# Altium PCB PCB1.PcbDoc
Units mm, origin at the board's own origin, x right, y up, seen from the top; angles counter-clockwise.
Board outline 95.5 x 100 mm, 4 copper layers (Top Layer, GND, POWER, Bottom Layer), stack 0.603 mm thick; 49 components, 46 nets, 157 pads, 25 vias.
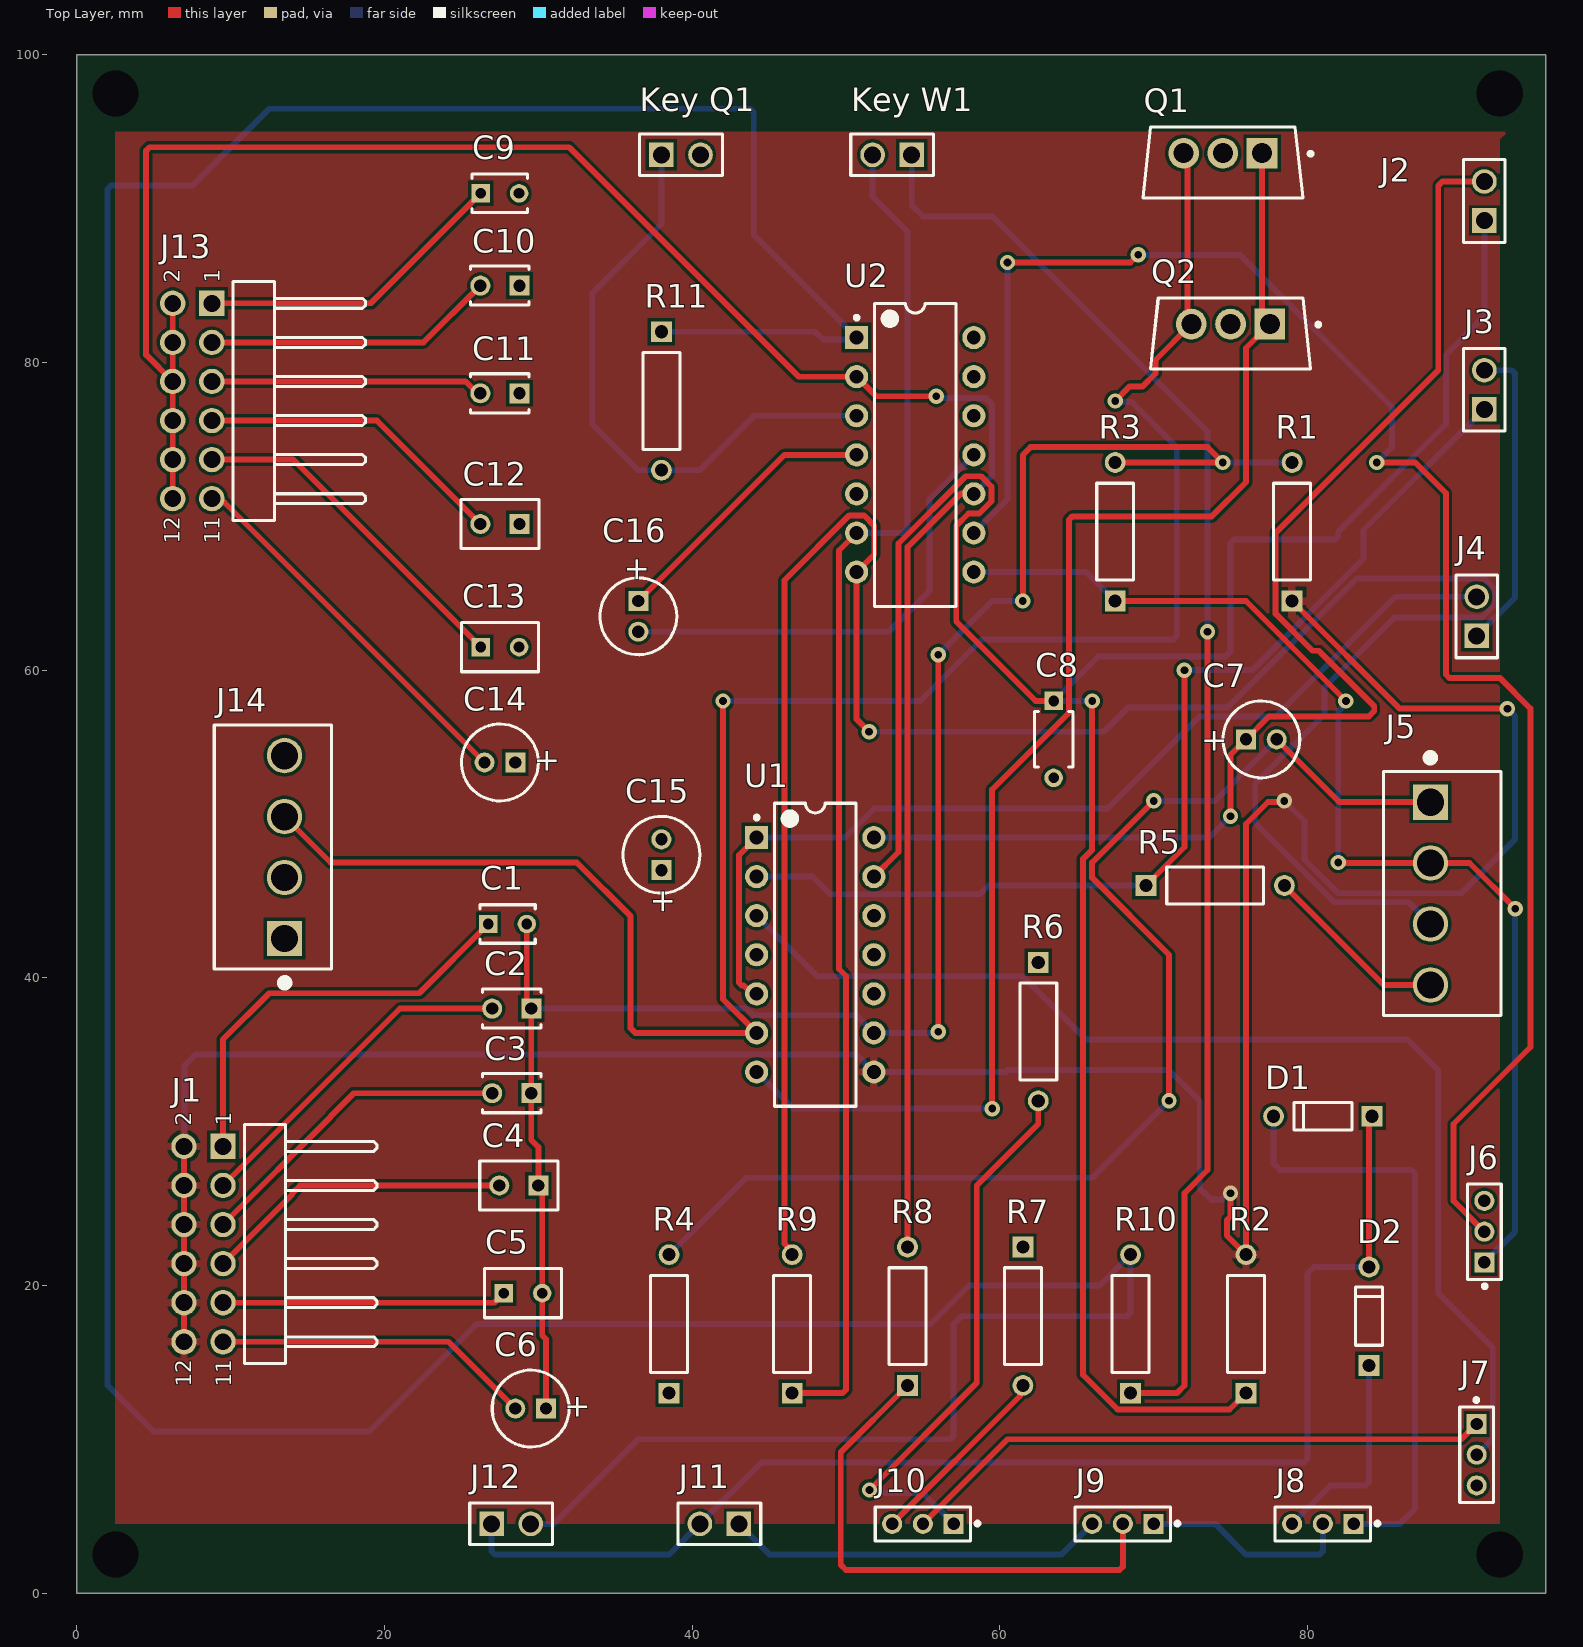
[diagram p0: Top Layer view]
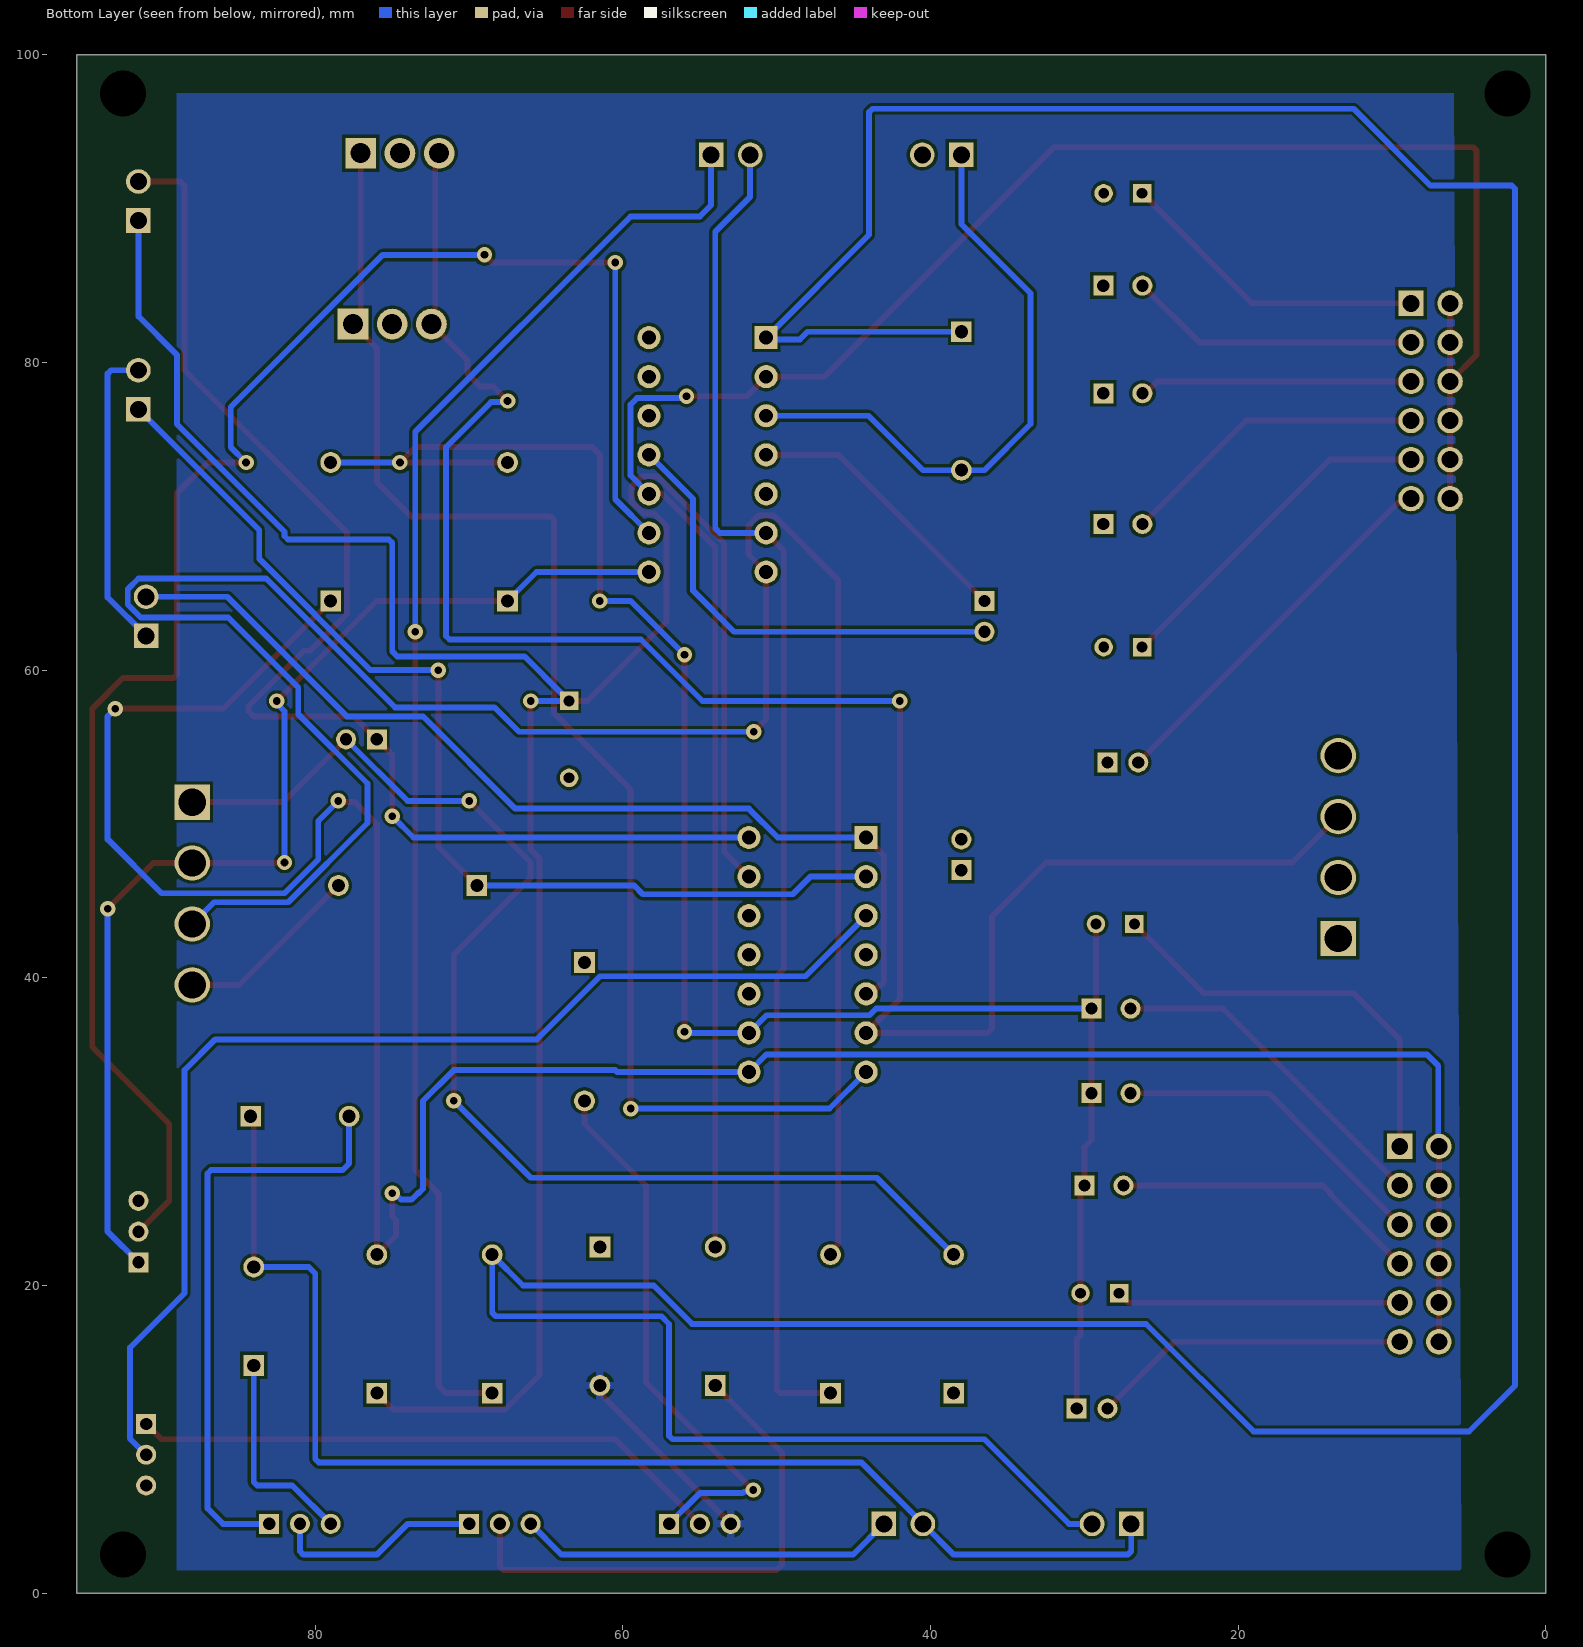
[diagram p1: Bottom Layer view, seen from below]
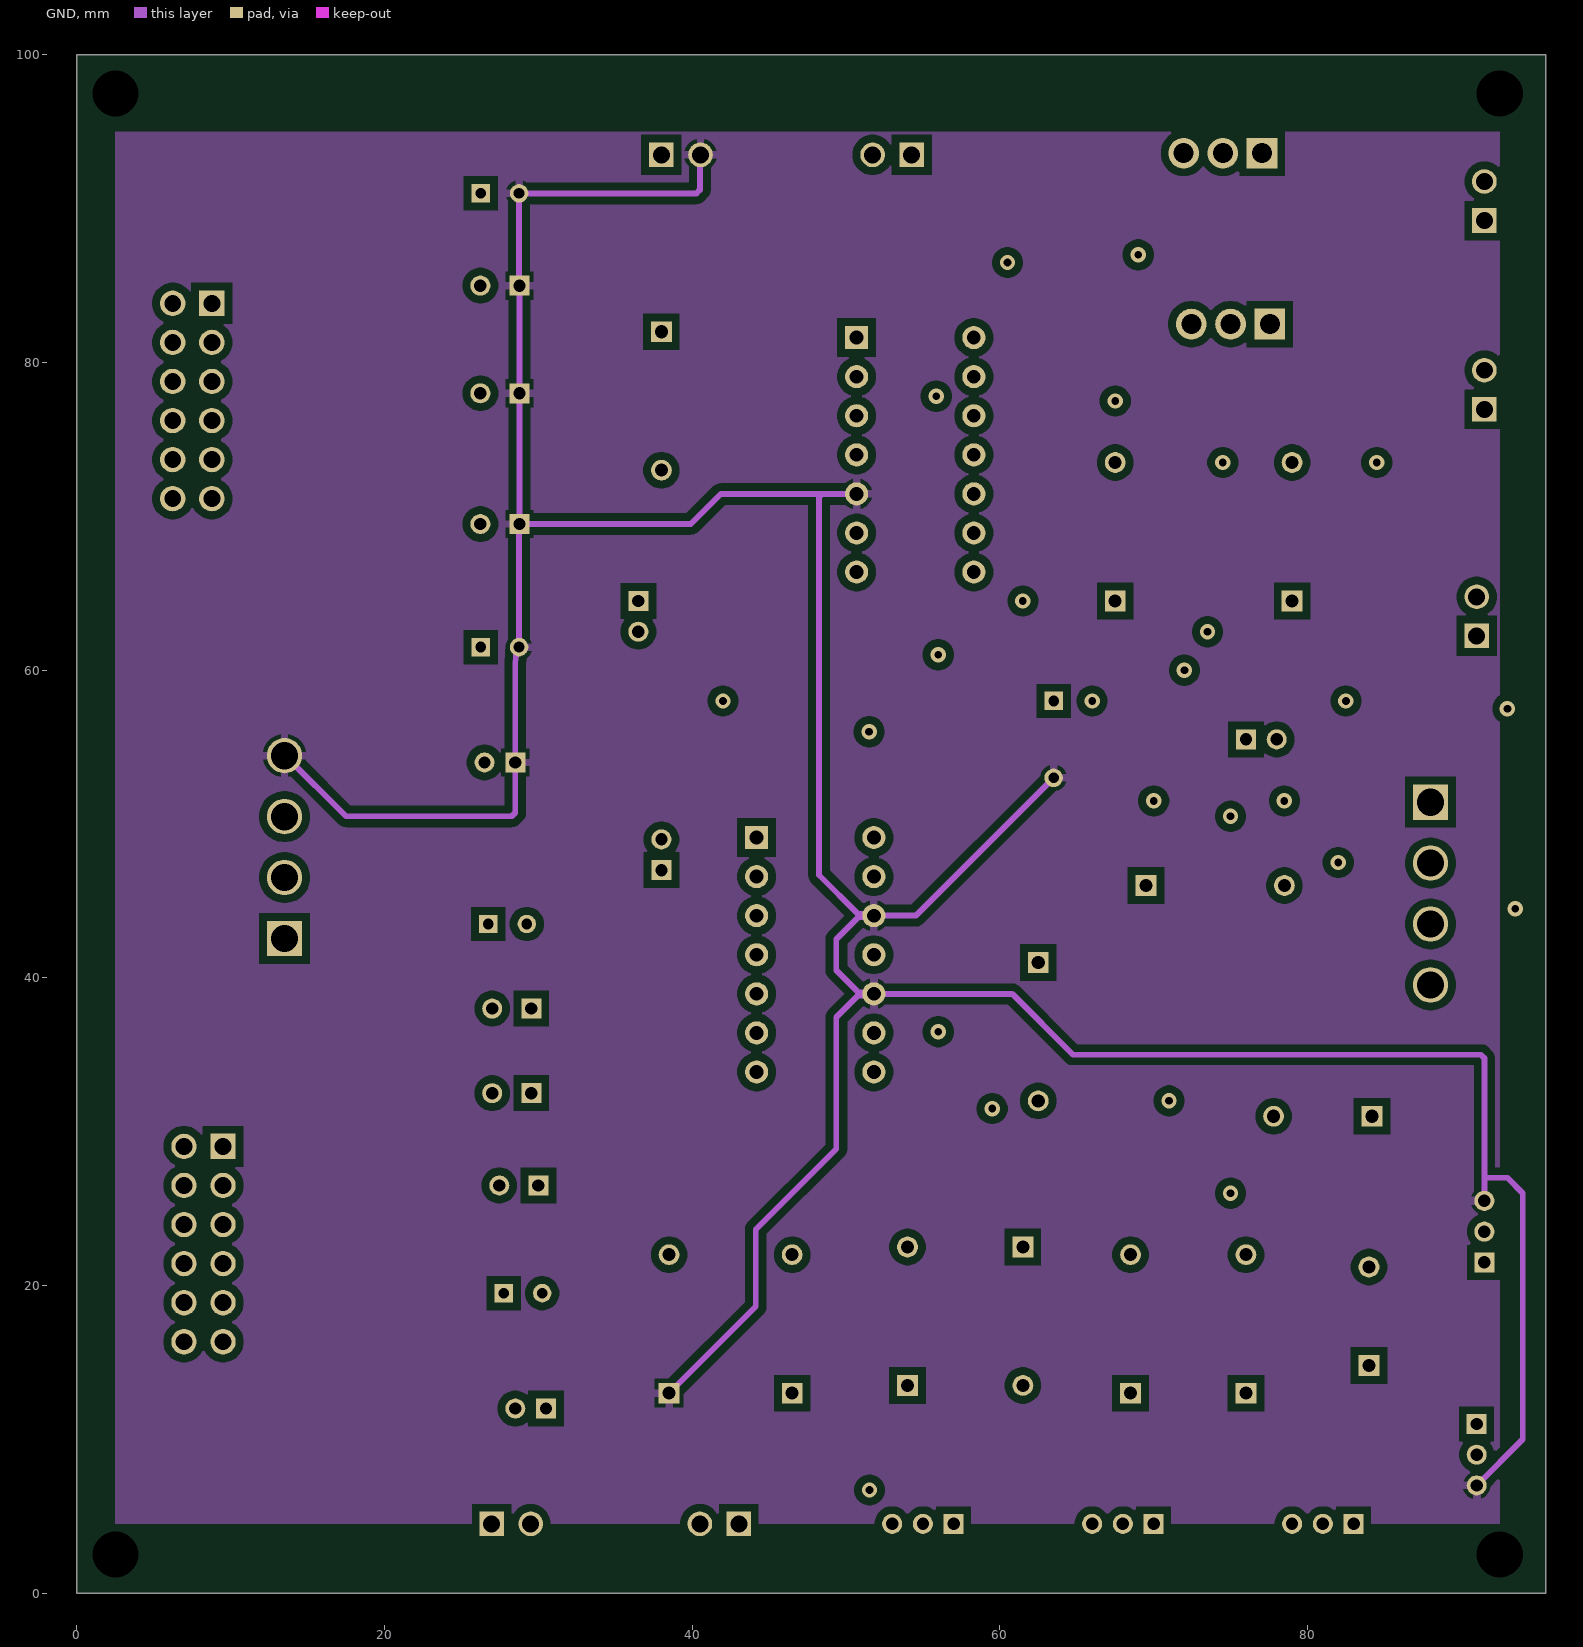
[diagram p2: GND]
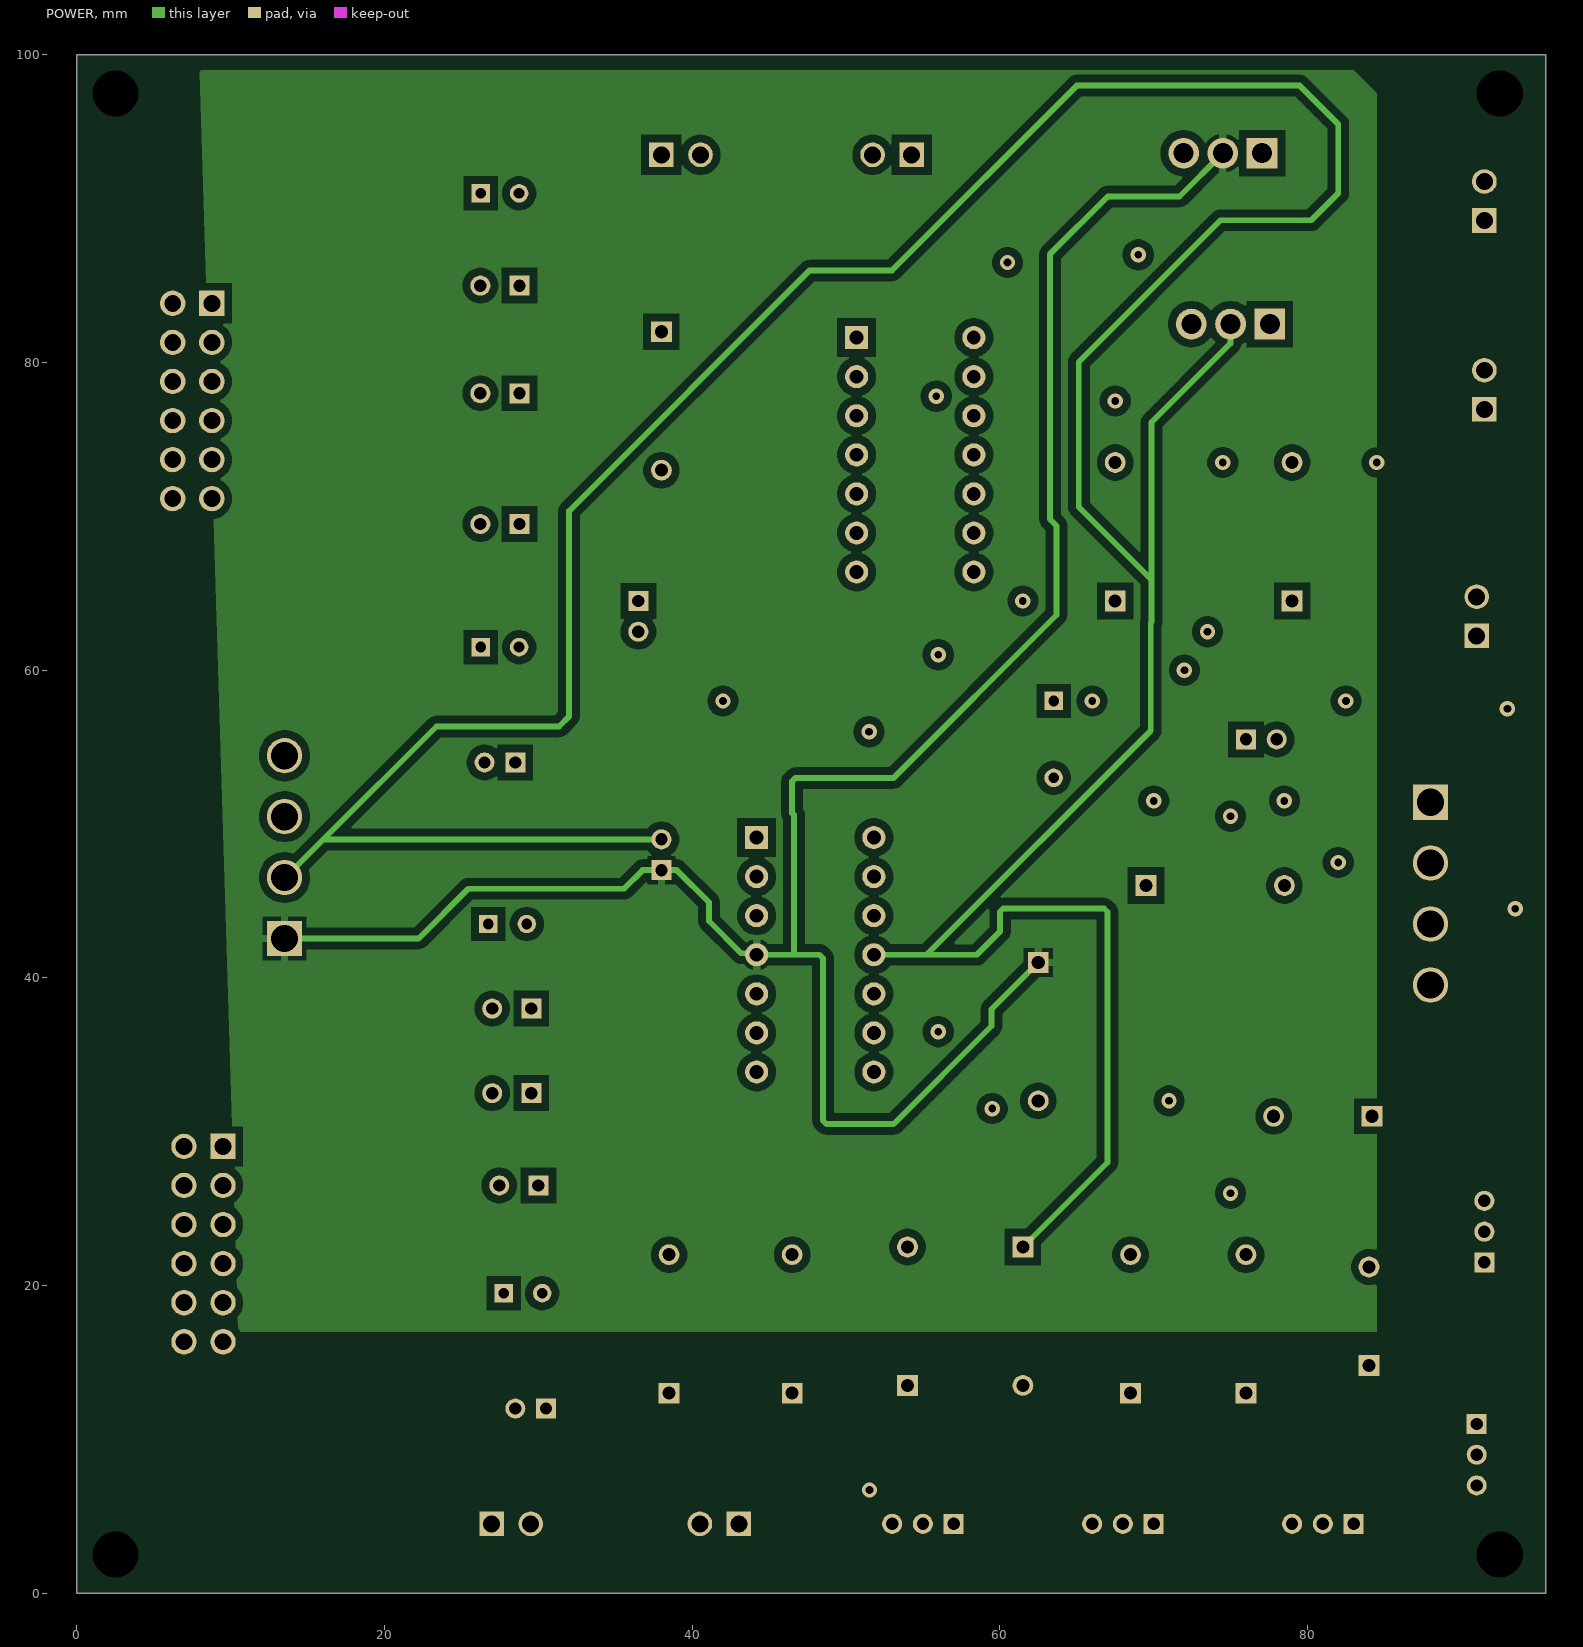
[diagram p3: POWER]

## Layer stack, top to bottom
Top Solder: solder mask 0.0102, Solder Resist, Dk 3.5
Top Layer: signal copper 0.0356
Dielectric 2: prepreg 0.0711, PP-006, Dk 4.1
GND: signal copper 0.035
Dielectric 1: dielectric 0.32, FR-4, Dk 4.8
POWER: signal copper 0.035
Dielectric 3: prepreg 0.0711, PP-006, Dk 4.1
Bottom Layer: signal copper 0.0356
Bottom Solder: solder mask 0.0102, Solder Resist, Dk 3.5

## Board outline
0,0 95.5,0 95.5,100 0,100

## Design rules (kind name [scope] priority, off if disabled: settings)
BoardOutlineClearance [All] p1: gap=0.2 ignorepadtopadclearanceinfootprint=FALSE except(0.4: Arc-SplitBarrior Arc-SplitContinuation Track-SplitBarrior Track-SplitContinuation SMDPad-SplitBarrior SMDPad-SplitContinuation THPad-SplitBarrior THPad-SplitContinuation Via-SplitBarrior Via-SplitContinuation Fill-SplitBarrior Fill-SplitContinuation Poly-SplitBarrior Poly-SplitContinuation Region-SplitBarrior Region-SplitContinuation Text-SplitBarrior Text-SplitContinuation)
Clearance "Clearance Bottom Layer" [OnLayer('Bottom Layer')] p1: gap=0.203 ignorepadtopadclearanceinfootprint=TRUE except(0.254: Arc-Text Track-Text SMDPad-Text THPad-Text Via-Text Fill-Text Poly-Text Region-Text Text-Text)
Clearance "Clearance Top Layer" [OnLayer('Top Layer')] p2: gap=0.203 ignorepadtopadclearanceinfootprint=TRUE except(0.254: Arc-Text Track-Text SMDPad-Text THPad-Text Via-Text Fill-Text Poly-Text Region-Text Text-Text)
Clearance [All] p3: gap=0.5 ignorepadtopadclearanceinfootprint=FALSE
HoleSize [All] p1: absolutevalues=TRUE maxlimit=6.3 minlimit=0.2 maxpercent=80.000 minpercent=20.000
MinimumAnnularRing [All] p1: minimumring=0.076
MinimumSolderMaskSliver [All] p1: minsoldermaskwidth=0.1
PolygonConnect PolygonConnect_1 [All] p1: thpad.connectstyle=Relief thpad.reliefconductorwidth=0.508 thpad.reliefentries=4 thpad.polygonreliefangle="90 Angle" thpad.airgapwidth=0.254 smdpad.connectstyle=Relief smdpad.reliefconductorwidth=0.508 smdpad.reliefentries=4 smdpad.polygonreliefangle="90 Angle" smdpad.airgapwidth=0.254 via.connectstyle=Direct via.reliefconductorwidth=0.508 via.reliefentries=4 via.polygonreliefangle="90 Angle" via.airgapwidth=0.254
RoomDefinition Sheet1 [InComponentClass('Sheet1')] p1 off: confinementstyle=ConfineIn formatcopy=TRUE lockcomponents=FALSE outline 95.5,2.5 404.999,2.5 404.999,26 95.5,26
RoutingCorners [All] p1: cornerstyle=Round minsetback=2.54 maxsetback=2.54
RoutingVias [All] p1: holewidth=0.5 width=1 viastyle="Through Hole" minholewidth=0.2 minwidth=0.45 maxholewidth=1 maxwidth=2
SilkToSilkClearance [All] p1: silktosilkclearance=0.1
SilkToSolderMaskClearance [IsPad] p1: minsilkscreentomaskgap=0.1 clearancetoexposedcopper=TRUE
SolderMaskExpansion [All] p1: expansion=0.102 istentingtop=FALSE
Width [All] p1: maxlimit=2.54 minlimit=0.089 preferedwidth=0.381
25 further rules are at their usual default settings.

## Components (designator, comment, footprint, x,y, rotation, side; value= is the part's Value field where it differs from the comment)
C1 "RCE5C1H101J0DBH03A" FP-RCE0DB-MFG 28,43.5 r0 top
C2 "C315C102K1R5TA" KEMT-C315-THT-2 28.27,38 r180 top
C3 "C315C103K1R5TA" KEMT-C315-THT-2 28.27,32.5 r180 top
C4 "C320C104K5R5TA" CAPR51-254-508X318X736 28.73,26.5 r180 top
C5 "K105Z20Y5VF5TL2" FP-K105Z20Y5VF5TL2-MFG 29,19.5 r0 top value=1uF
C6 "ECA1HM100" CAPPR55-200-1100X500X1200 29.5,12 r180 top
C7 "ECA1HM100" CAPPR55-200-1100X500X1200 77,55.5 r0 top
C8 "RCE5C1H271J0K1H03B" FP-RCE0K1-MFG 63.5,55.5 r270 top
C9 "RCE5C1H101J0DBH03A" FP-RCE0DB-MFG 27.5,91 r0 top
C10 "C315C102K1R5TA" KEMT-C315-THT-2 27.5,85 r180 top
C11 "C315C103K1R5TA" KEMT-C315-THT-2 27.5,78 r180 top
C12 "C320C104K5R5TA" CAPR51-254-508X318X736 27.5,69.5 r180 top
C13 "K105Z20Y5VF5TL2" FP-K105Z20Y5VF5TL2-MFG 27.5,61.5 r0 top value=1uF
C14 "ECA1HM100" CAPPR55-200-1100X500X1200 27.5,54 r180 top
C15 "ECA1HM100" CAPPR55-200-1100X500X1200 38,48 r90 top
C16 "ECA1HM100" CAPPR55-200-1100X500X1200 36.5,63.5 r270 top
D1 "BAT46" STM-DO-35-2 81,31 r180 top
D2 "BAT46" STM-DO-35-2 84,18 r90 top
J1 "61301221021" 61301221021 12.23,22.69 r90 top
J2 "61300211121" 61300211121 91.5,90.5 r90 top
J3 "61300211121" 61300211121 91.5,78.23 r90 top
J4 "61300211121" 61300211121 91,63.5 r90 top
J5 "640445-4" TECO-640445-4_V 88,45.481 r270 top
J6 "951103-8622-AR" FP-951103-8622-AR-MFG 91.5,23.5 r90 top
J7 "951103-8622-AR" FP-951103-8622-AR-MFG 91,9 r270 top
J8 "951103-8622-AR" FP-951103-8622-AR-MFG 81,4.5 r180 top
J9 "951103-8622-AR" FP-951103-8622-AR-MFG 68,4.5 r180 top
J10 "951103-8622-AR" FP-951103-8622-AR-MFG 55,4.5 r180 top
J11 "61300211121" 61300211121 41.77,4.5 r180 top
J12 "61300211121" 61300211121 28.23,4.5 r0 top
J13 "61301221021" 61301221021 11.5,77.5 r90 top
J14 "640445-4" TECO-640445-4_V 13.5,48.5 r90 top
"Key Q1" "61300211121" 61300211121 39.27,93.5 r0 top
"Key W1" "61300211121" 61300211121 53,93.5 r180 top
Q1 "TIP31C" FP-TO-220-P0A0015988-MFG 74.5,93 r270 top
Q2 "TIP32C" FP-TO-220-P0A0015988-MFG 75,81.893 r270 top
R1 "MFR-25FBF52-100K" RESA60-630X240 79,69 r90 top
R2 "MFR-25FBF52-1K" RESA60-630X240 76,17.5 r90 top
R3 "MFR-25FBF52-100K" RESA60-630X240 67.5,69 r90 top
R4 "MFR-25FBF52-100K" RESA60-630X240 38.5,17.5 r90 top
R5 "MFR-25FBF52-100K" RESA60-630X240 74,46 r0 top
R6 "MFR-25FBF52-100K" RESA60-630X240 62.5,36.5 r270 top
R7 "MFR-25FBF52-100K" RESA60-630X240 61.5,18 r270 top
R8 "MFR-25FBF52-1K" RESA60-630X240 54,18 r90 top
R9 "MFR-25FBF52-1K" RESA60-630X240 46.5,17.5 r90 top
R10 "MFR-25FBF52-100K" RESA60-630X240 68.5,17.5 r90 top
R11 "MFR-25FBF52-100K" RESA60-630X240 38,77.5 r270 top
U1 "TL084CN" N0014A 48,41.5 r0 top
U2 "TL084CN" N0014A 54.5,74 r0 top

## Footprints (in the part's own frame and the unit in brackets; to place one, negate y for a bottom-side part, rotate by r counter-clockwise, add the part's x,y. Pads: shape width x height; smd on the part's side, far side on the other; paste and mask are expansions set on the pad)
61300211121 [mm] "Pin Header, pitch 2.54 mm, THT, Vertical, single row, 2p"
  rect 1.6x1.6 hole 1.1: 1(-1.27,0)
  round 1.6 hole 1.1: 2(1.27,0)
  silkscreen extent -2.69,-1.35 2.69,1.35, body extent -2.54,-1.27 2.54,1.27, height 8.57
61301221021 [mm] "Pin Header, pitch 2.54 mm, THT, Angled, dual row, 12p"
  rect 1.65x1.65 hole 1.1: 1(6.35,2.73)
  round 1.65 hole 1.1: 2(6.35,5.27) 3(3.81,2.73) 4(3.81,5.27) 5(1.27,2.73) 6(1.27,5.27) 7(-1.27,2.73) 8(-1.27,5.27) 9(-3.81,2.73) 10(-3.81,5.27) 11(-6.35,2.73) 12(-6.35,5.27)
  silkscreen extent -7.77,-7.27 7.77,1.35, body extent -7.62,-7.27 7.62,5.63, height 5.12
CAPPR55-200-1100X500X1200 [mm] "THD, 2-Leads, Dia 5mm, Body Length 11mm"
  rect 1.3x1.3 hole 0.8: 1(-1,0)
  round 1.3 hole 0.8: 2(1,0)
  silkscreen extent -2.5,-2.5 2.5,2.5, body extent -2.5,-2.5 2.5,2.5, height 12
CAPR51-254-508X318X736 [mm] "THD, 2-Leads, Body 5.08x3.18mm"
  rect 1.3x1.3 hole 0.8: 1(-1.27,0)
  round 1.3 hole 0.8: 2(1.27,0)
  silkscreen extent -2.54,-1.59 2.54,1.59, body extent -2.54,-1.59 2.54,1.59, height 7.36
FP-951103-8622-AR-MFG [mm]
  rect 1.3x1.3 hole 0.8 paste-1000 mask+0: 1(-2,0)
  round 1.3 hole 0.8 paste-1000 mask+0: 2(0,0) 3(2,0)
  silkscreen extent -3.67,-1.1 3.1,1.1, body extent -3.2,-1.2 3.2,1.2, height 0.25
FP-K105Z20Y5VF5TL2-MFG [mm]
  rect 1.2x1.2 hole 0.7 paste-1000 mask+0: 1(-1.25,0)
  round 1.2 hole 0.7 paste-1000 mask+0: 2(1.25,0)
  silkscreen extent -2.5,-1.6 2.5,1.6, body extent -2.6,-1.7 2.6,1.7, height 0.25
FP-RCE0DB-MFG [mm]
  rect 1.2x1.2 hole 0.7 paste-1000 mask+0: 1(-1.25,0)
  round 1.2 hole 0.7 paste-1000 mask+0: 2(1.25,0)
  silkscreen extent -1.8,-1.25 1.8,1.25, body extent -1.95,-1.35 1.95,1.35, height 0.25
FP-RCE0K1-MFG [mm]
  rect 1.2x1.2 hole 0.7 paste-1000 mask+0: 1(-2.5,0)
  round 1.2 hole 0.7 paste-1000 mask+0: 2(2.5,0)
  silkscreen extent -1.8,-1.25 1.8,1.25, body extent -3.2,-1.35 3.2,1.35, height 0.25
FP-TO-220-P0A0015988-MFG [mm]
  rect 2x2 hole 1.3 paste-1000 mask+0: 1(-0.607,2.55)
  round 2 hole 1.3 paste-1000 mask+0: 2(-0.607,0) 3(-0.607,-2.55)
  silkscreen extent -2.3,-5.2 2.3,5.82, body extent -2.4,-5.3 2.4,5.3, height 0.25
KEMT-C315-THT-2 [mm] "THD, 2-Leads, Body 3.81x2.54mm"
  rect 1.3x1.3 hole 0.8: 1(-1.27,0)
  round 1.3 hole 0.8: 2(1.27,0)
  silkscreen extent -1.91,-1.27 1.91,1.27, body extent -1.91,-1.27 1.91,1.27, height 4.66
N0014A [mm] "DIP, 14-Leads, Body 19.7x6.6mm, Pitch 2.54mm"
  rect 1.5x1.5 hole 0.9: 1(-3.81,7.62)
  round 1.5 hole 0.9: 2(-3.81,5.08) 3(-3.81,2.54) 4(-3.81,0) 5(-3.81,-2.54) 6(-3.81,-5.08) 7(-3.81,-7.62) 8(3.81,-7.62) 9(3.81,-5.08) 10(3.81,-2.54) 11(3.81,0) 12(3.81,2.54) 13(3.81,5.08) 14(3.81,7.62)
  silkscreen extent -3.93,-9.85 2.65,9.85, body extent -3.95,-9.85 3.95,9.85, height 5.08
RESA60-630X240 [mm] "Axial Resistor, 2-Leads, Dia 2.4mm, Body Length 6.3mm"
  rect 1.35x1.35 hole 0.85: 1(-4.5,0)
  round 1.35 hole 0.85: 2(4.5,0)
  silkscreen extent -3.15,-1.2 3.15,1.2, body extent -3.15,-1.2 3.15,1.2, height 2.4
STM-DO-35-2 [mm] "THD, 2-Leads, Dia 1.765 mm, Body Length 3.775 mm"
  rect 1.35x1.35 hole 0.85: 1(-3.2,0)
  round 1.35 hole 0.85: 2(3.2,0)
  silkscreen extent -1.89,-0.88 1.89,0.88, body extent -1.89,-0.88 1.89,0.88, height 1.76
TECO-640445-4_V [mm] "CONN, 4-Leads, Body 7.62x15.85mm, Pitch 3.962mm"
  rect 2.3x2.3 hole 1.778: 1(-5.944,0)
  round 2.3 hole 1.778: 2(-1.981,0) 3(1.981,0) 4(5.944,0)
  silkscreen extent -9.07,-3.05 7.93,4.57, body extent -7.92,-3.05 7.93,4.57, height 13.16

## Part data
C1 C9: library part CMP-06035-041850-1, "Cap Ceramic 100pF 50V C0G ±5% Radial 2.5mm +125°C Ammo Pack", Capacitance=100pF, Case/Package=Radial, Dielectric=C0G, Max Operating Temperature=125°C, Min Operating Temperature=-55°C, Package Quantity=2000, Ratings=AEC-Q200, Resistor Type=Ceramic, Tolerance=5%, Voltage Rating=50V, Height=3.5mm, Height - Seated (Max)=0.138inch, Lead Diameter=0.5mm, Lead Pitch=0.098inch, Lead/Base Style=Straight, Length=0.142inch, Mount="Through Hole", Packaging="Tape and Reel", Termination=Radial, Voltage Rating (DC)=50V, Width=0.098inch
C2 C10: library part CMP-1664-00010-1, "Capacitor, Ceramic, 1000 pF, +/-10 %, 100 V, X7R, -55 to 125 degC, 2-Pin THD, RoHS, Bulk", Case\Package=DFN, Max Operating Temperature="125 degC", Max Supply Voltage="3.6 V", Min Operating Temperature="-40 degC", Min Supply Voltage="1.5 V", Nominal Supply Voltage="3 V", ComponentLink1Description="Manufacturer URL", ComponentLink1URL=http://www.kemet.com/, ComponentLink2Description=Datasheet, ComponentLink2URL=http://capacitoredge.kemet.com/capedge2/DataSheet/Datasheet-C315C102K1R5TA.pdf?pn=C315C102K1R5TA{BULK}, DatasheetVersion=Aug-16, Interface=Serial, Mount="Surface Mount", PackageDescription="2-Pin Through Hole Device, Body 3.81 x 2.54 mm", PackageReference=C315-THT-2, Packaging="Tape and Reel", Pins=6, Radiation Hardening=No, REACH SVHC=Unknown, RoHSCompliant=true
C3 C11: library part CMP-1664-00007-1, "Capacitor, Ceramic, 0.01 uF, +/- 10%, 100 V, X7R, -55 to 125 degC, 2-Pin THD, RoHS, Bulk", Case\Package=PDIP, Forward Current="60 mA", Forward Voltage="1.5 V", Max Operating Temperature="100 degC", Max Power Dissipation="400 mW", Min Operating Temperature="-55 degC", Output Voltage="70 V", Package Quantity=2000, Channels=2, ComponentLink1Description="Manufacturer URL", ComponentLink1URL=http://www.kemet.com/, ComponentLink2Description=Datasheet, ComponentLink2URL=http://capacitoredge.kemet.com/capedge2/DataSheet/Datasheet-C315C103K1R5TA.pdf?pn=C315C103K1R5TA{BULK}, DatasheetVersion=Aug-16, Mount="Through Hole", Nominal Vf="1.3 V", PackageDescription="2-Pin Through Hole Device, Body 3.81 x 2.54 mm", PackageReference=C315-THT-2, Packaging=Rail/Tube, Pins=16, Radiation Hardening=No, REACH SVHC=Unknown, RoHSCompliant=true, Vce Max="500 mV"
C4 C12: library part CMP-1664-00004-1, "Radial Leaded Multilayer Ceramic Capacitor, 0.1 uF, +/- 10%, 50 V, -55 to 125 degC, 2-Pin THD, RoHS, Tape and Reel", Case\Package=SOT-23-5, Dropout Voltage="260 mV", Max Input Voltage="8 V", Max Operating Temperature="85 degC", Max Power Dissipation="250 mW", Min Operating Temperature="-40 degC", Output Current="150 mA", Output Voltage="5 V", Package Quantity=3000, ComponentLink1Description="Manufacturer URL", ComponentLink1URL=http://www.kemet.com/, ComponentLink2Description=Datasheet, ComponentLink2URL=http://www.kemet.com/docfinder?Partnumber=C320C104K5R5TA, DatasheetVersion=Dec-15, Height="1.3 mm", Length="3 mm", Mount="Surface Mount", Outputs=1, PackageDescription="2-Pin Through Hole Device, Body 5.08 x 3.18 mm, Pitch 2.54 mm", PackageReference=CAPR51-254-508X318X736, Packaging="Tape and Reel", Pins=5, Radiation Hardening=No, RoHSCompliant=true, Width="1.8 mm"
C5 C13: library part CMP-02417-000003-1, "CAP CER 1UF 50V Y5V RADIAL", Capacitance=1uF, Manufacturer="Vishay BC Components", Temperature="-30°C to +85°C", Temperature Characteristic=Y5V, Temperature Range High=+85°C, Temperature Range Low=-30°C, Tolerance=-20+80%, Voltage Rating=50V, Automotive=No, Category=Cap, ComponentLink2Description=Datasheet, ComponentLink2URL=https://www.vishay.com/docs/45171/kseries.pdf, Device Class L1="Passive Components", Device Class L2=Capacitors, Device Class L3="Ceramic Capacitors", Digikey Description="CAP CER 1UF 50V Y5V RADIAL", Height=6.6mm, Lead Free=Yes, Manufacturer Part Number=K105Z20Y5VF5TL2, Material=Ceramic, Mouser Description="Multilayer Ceramic Capacitors MLCC - Leaded 1uF 50volts +80/-20% Y5V 2.5mm LS", Octopart=https://octopart.com/k105z20y5vf5tl2-vishay-39475252, Package=K105Z20Y5VF5TL2, RoHS=TRUE
C6 C7 C14 C15 C16: library part CMP-1665-00038-2, "Aluminum Electrolytic Capacitor, 10 uF, +/- 20%, 50 V, -40 to 85 degC, 2-Pin THD, RoHS, Bulk", Capacitance=10uF, Case/Package=Radial, Dielectric Material=Aluminium, Leakage Current=3uA, Manufacturer=Panasonic, Max Operating Temperature=85degC, Min Operating Temperature=-40degC, Package Description="2-Pin Radial Lead, Dia 5 mm, Height 12 mm", Package Quantity=200, Package Reference=CAPPR55-200-1100X500X1200, Ripple Current=65mA, Tolerance=20%, Voltage=50V, Datasheet URL=https://industrial.panasonic.com/cdbs/www-data/pdf/RDF0000/ABA0000C1218.pdf, Datasheet Version="Rev. 05, 10/2016", Diameter=5mm, Dissipation Factor=0.12%, Height=11mm, Height - Seated (Max)=0.472inch, Lead Diameter=0.5mm, Lead Free=LeadFree, Lead Pitch=2mm, Lead/Base Style=Straight, Length=11mm, Life (Hours)=2000Hour, Manufacturer URL=http://www.panasonic.com/, Mount=ThroughHole, Number of Pins=2, Packaging=Bulk, Radiation Hardening=No, REACH SVHC=NoSVHC, Ripple Current (AC)=65mA, RoHSCompliant=true, Termination=Radial, Voltage Rating=50V, Voltage Rating (DC)=50V
C8: library part CMP-06035-042310-1, "Cap Ceramic 270pF 50V C0G ±5% Radial 5mm +125°C Automotive Bulk", Capacitance=270pF, Case/Package=Radial, Dielectric=C0G, Max Operating Temperature=125°C, Min Operating Temperature=-55°C, Package Quantity=500, Ratings=AEC-Q200, Resistor Type=Ceramic, Tolerance=5%, Voltage Rating=50V, Height=3.5mm, Height - Seated (Max)=0.138inch, Lead Diameter=0.5mm, Lead Pitch=0.197inch, Lead/Base Style="Formed Leads", Length=0.142inch, Mount="Through Hole", Packaging=Bulk, Termination=Radial, Voltage Rating (DC)=50V, Width=2.5mm
D1 D2: library part CMP-2000-05926-1, "Small Signal Schottky Diode, 150 mA, 100 V, -65 to 125 degC, 2-Pin DO-35, RoHS, Tape and Reel", Diode Case Style=DO-204AH, Forward Current If(AV)=150mA, Forward Surge Current Ifsm Max=750mA, Forward Voltage VF Max=1V, Manufacturer=STMicroelectronics, Operating Temperature Max=125°C, Package Description="2-Pin Axial Lead, Dia 1.765 mm, Body Length 3.775 mm", Package Reference=DO-35-2, Repetitive Reverse Voltage Vrrm Max=100V, Datasheet URL=http://www.st.com/content/ccc/resource/technical/document/datasheet/group1/11/76/e4/a3/df/07/49/14/CD00000767/files/CD00000767.pdf/jcr:content/translations/en.CD00000767.pdf, Datasheet Version="Rev. 2.1, 10/2001", Diode Configuration=Single, Diode Type=Schottky, Manufacturer URL=http://www.st.com/, Mounting Technology=ThroughHole, No. of Pins=2Pins, Packaging=Tape&Reel, Product Range=-, SVHC=NoSVHC(15-Jun-2015)
J1 J13: library part CMP-1502-01087-1, "THT Angled Pin Header WR-PHD, Pitch 2.54 mm, Dual Row, 12 pins", Contact Resistance=20mOhm, Manufacturer="Wurth Elektronik", Operating Temperature=-40to105degC, Rated Current=3A, Withstanding Voltage=500VAC, Working Voltage=250VAC, Datasheet URL=https://katalog.we-online.de/em/datasheet/6130xx21021.pdf, Gender=Male, Manufacturer URL=http://www.we-online.de, Mounting Technology=THT, Orientation=Angled, Package Reference=61301221021, Packaging=Bag, Part Number=61301221021, Pin Number=12, Pitch=2.54mm, Publisher=WurthElektronik, Row Number=Dual
J2 J3 J4 J11 J12 "Key Q1" "Key W1": library part CMP-1712-00002-4, "THT Vertical Pin Header WR-PHD, Pitch 2.54 mm, Single Row, 2 pins", Contact Resistance=20mOhm, Manufacturer="Wurth Elektronik", Operating Temperature=-40to105degC, Rated Current=3A, Withstanding Voltage=500VAC, Working Voltage=250VAC, Datasheet URL=https://katalog.we-online.de/em/datasheet/6130xx11121.pdf, Gender=Male, Manufacturer URL=http://www.we-online.de, Mounting Technology=THT, Orientation=Vertical, Package Reference=61300211121, Packaging=Bag, Part Number=61300211121, Pin Number=2, Pitch=2.54mm, Publisher=WurthElektronik, Row Number=Single
J5 J14: library part CMP-1684-00016-1, "Male Header, Pitch 3.962 mm, 1 x 4 Postion, Height 13.716 mm, Tail Length 3.175 mm, -55 to 105 degC, RoHS", Color=White, Current, Rating="7 /  / A", Flammability Rating=UL94V-0, Manufacturer="TE Connectivity", Package Description="Male Header, Pitch 3.962 mm, 1 x 4 Postion, Height 13.716 mm, Tail Length 3.175 mm", Package Reference=THD, Temperature, Operating="-55to+105 /  / °C", Voltage, Rating="600 /  / V", Agency Approvals=CSA,UL, Angle=Straight, Application=Forwire-to-board, Brand/Series=MTA-156Series, Color, Housing=White, Connector Type=Male, Contact Centerline Spacing="0.156 /  / in.", Contact Plating=Tin, Datasheet URL=http://www.te.com/commerce/DocumentDelivery/DDEController?Action=showdoc&DocId=Customer+Drawing%7F640445%7FAD5%7Fpdf%7FEnglish%7FENG_CD_640445_AD5.pdf%7F640445-4, Datasheet Version="Rev. AD5", Diameter, Insulation="0.095\"(SingleWire),0.07\"(MassTerminationWires)", Length, Overall="0.624 /  / \"", Length, Pin="0.125 /  / \"", Length, Terminal Post="0.125 /  / in.", Manufacturer URL=http://www.te.com, Material, Contact=CopperAlloy, Material, Housing=ThermoplasticPolyester, Mount Angle=Vertical, Mounting Hole Size="0.07 /  / \"", Mounting Type=PCBMount, Number of Contacts=4, Number of Positions=4, Number of Rows=1, Pin Spacing="0.156 /  / \"", Primary Type=InterconnectSystem, Special Features=IDC,Pinstrip, Standards=UL94V-0HousingFlammabilityRating,RoHSCompliant,ELVCompliant, Termination=Solder, Type=PCBPlug, Wire, AWG=26-18
J6 J7 J8 J9 J10: library part CMP-05379-000003-1, "CONN HEADER VERT 3POS 2MM", Current Rating=2A, Manufacturer=3M, Temperature="-55°C to +125°C", Temperature Range High=+125°C, Temperature Range Low=-55°C, Automotive=No, Category=Conn, ComponentLink2Description=Datasheet, ComponentLink2URL=http://multimedia.3m.com/mws/media/1400506O/3m-pin-strip-header-951-series-78-5100-2653-3.pdf, Conn Gender=Male, Conn Orientation=Straight, Contact Material=Gold,Nickel, Device Class L1=Connectors, Device Class L2="Headers and Wire Housings", Device Class L3=unset, Digikey Description="CONN HEADER VERT 3POS 2MM", Height=6.3mm, Lead Free=Yes, Manufacturer Part Number=951103-8622-AR, Mouser Description="Header; PinStrip; CopperAlloy; HighTempThermoplastic; 3Cnts; 1A; RtAngle; 951Series", Number of Contacts=3, Number of Rows=1, Octopart=https://octopart.com/951103-8622-ar-3m-14400669, Package=951103-8622-AR, Pitch=2mm, RoHS=TRUE
Q1: library part CMP-12195-000001-1, "TRANS NPN 100V 3A TO-220", Collector Base Voltage=100V, Collector Emitter Saturation Voltage=1.2V, Emitter Base Voltage=5V, Manufacturer=STMicroelectronics, Max Collector Current=3A, Max Junction Temp=+150°C, Package=TO-220-P0A0015988, Power Dissipation=2W, Temperature="to +150°C", Automotive=No, Category=Trans, Collector Emitter Voltage=100V, ComponentLink2Description=Datasheet, ComponentLink2URL=https://www.st.com/resource/en/datasheet/tip31c.pdf, Device Class L1="Discrete Semiconductors", Device Class L2=Transistors, Device Class L3=BJTs, Digikey Description="TRANS NPN 100V 3A TO-220", Height=19.68mm, Hfe Max=50, Hfe Min=10, Hfe Testic=3A, Hfe Testvce=4V, Lead Free=Yes, Manufacturer Part Number=TIP31C, Mouser Description="Bipolar Transistors - BJT NPN Gen Pur Power", Number Of Elements=1, Number Of Npn=1, Octopart=https://octopart.com/tip31c-stmicroelectronics-15555, RoHS=TRUE, Standoff Height=3.5mm, Temperature Range High=+150°C
Q2: library part CMP-12195-000005-1, "TRANS PNP 100V 3A TO-220", Collector Base Voltage=-100V, Collector Emitter Saturation Voltage=-1.2V, Emitter Base Voltage=-5V, Manufacturer=STMicroelectronics, Max Collector Current=-3A, Max Junction Temp=+150°C, Package=TO-220-P0A0015988, Power Dissipation=2W, Temperature="to +150°C", Automotive=No, Category=Trans, Collector Emitter Voltage=-100V, ComponentLink2Description=Datasheet, ComponentLink2URL=https://www.st.com/resource/en/datasheet/tip32c.pdf, Device Class L1="Discrete Semiconductors", Device Class L2=Transistors, Device Class L3=BJTs, Digikey Description="TRANS PNP 100V 3A TO-220", Height=19.68mm, Hfe Max=50, Hfe Min=10, Hfe Testic=-3A, Hfe Testvce=-4V, Lead Free=Yes, Manufacturer Part Number=TIP32C, Mouser Description="Original ST Microelectronics Transistor, 100V, 3A, .22 Ohm, TO-220 Package", Number Of Elements=1, Number Of Pnp=1, Octopart=https://octopart.com/tip32c-stmicroelectronics-353617, RoHS=TRUE, Standoff Height=3.5mm, Temperature Range High=+150°C
R1 R3 R4 R5 R6 R7 R10 R11: library part CMP-1659-00073-1, "Axial Resistor, 100 KOhm, +/- 1%, 0.25 W, -55 to 155 degC, 2-Pin THD, RoHS, Bulk", Case\Package=Axial, Max Operating Temperature="155 degC", Min Operating Temperature="-55 degC", Package Quantity=200, Power Rating="250 mW", Resistance="475 Ohm", Tolerance=1%, Voltage Rating="250 V", ComponentLink1Description="Manufacturer URL", ComponentLink1URL=http://www.yageo.com/, ComponentLink2Description=Datasheet, ComponentLink2URL=http://www.yageo.com/documents/recent/Yageo%20LR_MFR_2013.pdf, DatasheetVersion=Apr-13, Length="0.248 inch", Mount="Through Hole", PackageDescription="2-Pin Axial Lead, Dia 2.4 mm, Body Length 6.3 mm", PackageReference=MFR-25, Packaging=Bulk, RoHSCompliant=true
R2 R8 R9: library part CMP-1659-00075-1, "Axial Resistor, 1 KOhm, +/- 1%, 250 mW, -55 to 155 degC, 2-Pin THD, RoHS, Bulk", Case\Package=Axial, Max Operating Temperature="155 degC", Min Operating Temperature="-55 degC", Package Quantity=200, Power Rating="250 mW", Resistance="10 kohm", Tolerance=1%, Voltage Rating="250 V", ComponentLink1Description="Manufacturer URL", ComponentLink1URL=http://www.yageo.com/, ComponentLink2Description=Datasheet, ComponentLink2URL=http://www.yageo.com/documents/recent/Yageo%20LR_MFR_2013.pdf, DatasheetVersion=Apr-13, Length="0.248 inch", PackageDescription="2-Pin Axial Lead, Dia 2.4 mm, Body Length 6.3 mm", PackageReference=MFR-25, Packaging=Bulk, RoHSCompliant=true
U1 U2: library part CMP-0017-00818-2, "JFET-Input Operational Amplifier, 7 to 36 V, 0 to 70 degC, 14-pin DIP (N14), Pb-Free (RoHS)", Manufacturer="Texas Instruments", Rating=Catalog, Total Supply Voltage(Max)(+5V is 5, +/-5V is 10)=36, Total Supply Voltage(Min)(+5V is 5, +/-5V is 10)=7, CMRR(Min)(dB)=70, Code_JEDEC=MS-001, ComponentLink1Description="Manufacturer URL", ComponentLink1URL=http://www.ti.com/, ComponentLink2Description=Datasheet, ComponentLink2URL=http://www.ti.com/lit/ds/symlink/tl084.pdf, ComponentLink3Description="Package Specification", ComponentLink3URL=http://www.ti.com/lit/ml/mpdi002c/mpdi002c.pdf, DatasheetVersion=SLOS081G, Eco-Plan="Pb-Free (RoHS)", GBW(Typ)(MHz)=3, IIB(Max)(pA)=400, Iq per channel(Max)(mA)=2.8, Mounting Technology="Through Hole", Number of Channels=4, Offset Drift(Typ)(uV/C)=18, PackageDescription="14-Pin Plastic In-Line, Body 19.305 x 6.35 mm, Pitch 2.54 mm", PackageReference=N0014A, PackageVersion="4040049/E, 12/2002", PartNumber=TL084CN, Slew Rate(Typ)(V/us)=13, Sub Family="General Purpose Amplifier, High Supply Voltage Amplifier (>=30V)", Vio (25C)(Max)(mV)=15, Vn at 1kHz(Typ)(nV/rtHz)=18

## Free pads (board coordinates)
  round 1.524 hole 3 unplated: 2(2.5,97.5) 3(92.5,97.5) 4(92.5,2.5) 5(2.5,2.5)

## Via types
v1: diameter 1, hole 0.5, Top Layer to Bottom Layer, 25 vias

## Nets (pads, with @x,y where several pads share a name; then routed paths per layer and width w, separated by ;. In a path a pad name is that pad's centre, name@x,y a point inside that pad or via, vN(x,y) a via of type N, cw(c..) or ccw(c..) an arc to the next point about the centre after c; other vN are vias at no path point)
+VCC: C15.1 J14.1 Q1.2 R6.1 U1.4 | length 140.2
  POWER w0.381: J14.1 22.216,42.556 25.45,45.791 35.569,45.791 36.778,47 C15.1 39,47 41.09,44.91 41.09,43.689 43.179,41.6 44.091,41.6 U1.4 46.5,41.5 ; R6.1 59.461,37.961 59.461,36.864 53.098,30.5 48.723,30.5 48.5,30.723 48.5,41.277 48.277,41.5 46.5,41.5 ; Q1.2 71.682,90.789 67.013,90.789 63.254,87.03 63.254,69.827 63.691,69.39 63.691,63.593 53.098,53 46.723,53 46.5,52.777 46.5,50.701 46.631,50.57 46.631,41.631 46.5,41.5
-VCC: C15.2 J14.2 Q2.2 R7.1 U1.11 | length 253.2
  POWER w0.381: J14.2 13.555,46.519 16.036,49 ; C15.2 16.036,49 ; U1.11 52.821,41.5 55.239,41.5 ; R7.1 67,28 67,44.277 66.777,44.5 60.223,44.5 60,44.277 60,43 58.5,41.5 55.239,41.5 ; Q2.2 75,81.245 69.865,76.111 69.865,65.875 ; 16.036,49 23.376,56.341 31.341,56.341 32,57 32,70.345 47.645,85.99 52.99,85.99 65,98 79.5,98 82,95.5 82,91 80.25,89.25 74.348,89.25 65.135,80.037 65.135,70.606 69.865,65.875 ; 55.239,41.5 69.809,56.07 69.809,63.069 69.865,63.125 69.865,65.875
GND: "Key Q1.2" C8.2 C9.2 C10.1 C11.1 C12.1 C13.2 C14.1 J6.3 J7.3 J14.4 R4.1 U1.10 U1.12 U2.5 | length 252.6
  GND w0.381: J14.4 13.555,54.444 17.498,50.5 28.277,50.5 28.5,50.723 C14.1 28.5,60.532 ccw(c26.85,60.9) 28.541,60.9 28.541,61.29 C13.2 28.75,69.48 C12.1 ; R4.1 44.135,18.635 44.135,23.635 49.369,28.87 49.369,37.431 50.799,38.861 51.711,38.861 U1.10 ; 40.54,93.5 40.5,93.46 40.5,91.223 40.277,91 C9.2 28.75,85.02 C10.1 C11.1 C12.1 ; U2.5 48.46,71.46 ; C8.2 54.54,44.04 U1.12 ; J7.3 94,10 94,26 93,27 91.5,27 ; J6.3@91.5,25.84 91.5,27 ; C12.1 39.906,69.5 41.866,71.46 48.46,71.46 ; 48.46,71.46 48.249,71.249 48.249,46.689 50.799,44.14 51.711,44.14 U1.12 ; U1.10 51.711,39.06 50.799,39.06 49.369,40.489 49.369,42.511 50.799,43.941 51.711,43.941 U1.12 ; U1.10 60.799,38.96 64.759,35 91.277,35 91.5,34.777 91.5,27
NetC1_1: C1.1 J1.1 | length 27.3
  Top Layer w0.381: J1.1 9.5,36 12.5,39 22.25,39 C1.1
NetC1_2: C1.2 C2.1 C3.1 C4.1 C5.2 C6.1 R1.2 R3.2 U1.9 | length 125.2
  Top Layer w0.381: C1.2 29.25,38.29 C2.1 C3.1 29.54,29.46 30,29 C4.1 30.25,26.25 C5.2 30.25,16.75 30.5,16.5 C6.1 ; v1(56,36.5) v1(56,61) ; v1(61.5,64.5) 61.5,74 62,74.5 73.5,74.5 v1(74.5,73.5) R3.2
  Bottom Layer w0.381: C2.1 43.533,38 43.969,37.564 50.666,37.564 U1.9 55.92,36.42 v1(56,36.5) ; v1(56,61) 59.5,64.5 v1(61.5,64.5) ; v1(74.5,73.5) R1.2
NetC2_2: C2.2 J1.3 | length 22.3
  Top Layer w0.381: J1.3 21,38 C2.2
NetC3_2: C3.2 J1.5 | length 21.1
  Top Layer w0.381: J1.5 16.5,30.96 16.5,31 18,32.5 C3.2
NetC4_2: C4.2 J1.7 | length 20.1
  Top Layer w0.381: J1.7 14,25.92 14,26 14.5,26.5 C4.2
NetC5_1: C5.1 J1.9 | length 18.5
  Top Layer w0.381: J1.9 27.13,18.88 C5.1
NetC6_2: C6.2 J1.11 | length 20.8
  Top Layer w0.381: J1.11 24.16,16.34 C6.2
NetC7_1: C7.1 J2.2 U1.14 | length 82.8
  Top Layer w0.381: v1(75,50.5) 75,54.5 C7.1 77.5,57 84,57 84.342,57.342 84.342,57.658 80.734,61.266 80.327,61.266 77.931,63.662 77.931,68.931 88.5,79.5 88.5,91.5 88.77,91.77 J2.2
  Bottom Layer w0.381: U1.14 73.62,49.12 v1(75,50.5)
NetC7_2: C7.2 J5.1 R4.2 | length 81.2
  Top Layer w0.381: v1(70,51.5) 66,47.5 66,46.5 71,41.5 v1(71,32) ; C7.2 82.075,51.425 J5.1
  Bottom Layer w0.381: R4.2 43.5,27 66,27 v1(71,32) ; v1(70,51.5) 74,51.5 C7.2
NetC8_1: C8.1 J2.1 R2.1 U1.13 | length 159.1
  Top Layer w0.381: U1.13 53.416,48.186 53.416,68.242 57.778,72.604 58.784,72.604 59.454,71.934 59.454,70.986 58.657,70.19 57.963,70.19 57.166,69.394 57.166,63.162 62.328,58 C8.1 ; v1(66,58) 66,48.326 65.416,47.742 65.416,14.177 67.662,11.931 74.931,11.931 R2.1
  Bottom Layer w0.381: v1(66,58) C8.1 63.91,58.41 66.394,60.894 74.671,60.894 75,61.223 75,68.277 75.223,68.5 81.777,68.5 82,68.723 82,69 89,76 89,80.5 91.5,83 J2.1
NetC9_1: C9.1 J13.1 | length 20.4
  Top Layer w0.381: J13.1 19.1,83.85 C9.1
NetC10_2: C10.2 J13.3 | length 19
  Top Layer w0.381: J13.3 22.54,81.31 C10.2
NetC11_2: C11.2 J13.5 | length 17.8
  Top Layer w0.381: J13.5 25.273,78.77 26.043,78 C11.2
NetC12_2: C12.2 J13.7 | length 20.2
  Top Layer w0.381: J13.7 19.5,76.23 C12.2
NetC13_1: C13.1 J13.9 | length 22.5
  Top Layer w0.381: J13.9 14.06,73.69 C13.1
NetC14_2: C14.2 J13.11 | length 24.8
  Top Layer w0.381: J13.11 9.013,70.907 9.593,70.907 C14.2
NetC16_1: C16.1 U2.4 | length 18.1
  Top Layer w0.381: C16.1 46,74 U2.4
NetC16_2: C16.2 U2.11 | length 30.1
  Bottom Layer w0.381: C16.2 52.777,62.5 55.436,65.16 55.436,71.126 U2.11
NetD1_1: D1.1 D2.2 J11.2 J12.1 | length 83.6
  Top Layer w0.381: D2.2 84,30.8 D1.1
  Bottom Layer w0.381: J12.1 26.96,2.723 27.183,2.5 38.5,2.5 J11.2 44.5,8.5 79.777,8.5 80,8.723 80,20.777 80.423,21.2 D2.2
NetD1_2: D1.2 J8.1 | length 38.7
  Bottom Layer w0.381: D1.2 77.8,27.923 78.223,27.5 86.777,27.5 87,27.277 87,5.5 86,4.5 J8.1
NetD2_1: D2.1 J8.3 | length 13.7
  Bottom Layer w0.381: J8.3 81.5,7 83.777,7 84,7.223 D2.1
NetJ1_2: J1.2 J1.4 J1.6 J1.8 J1.10 J1.12 R1.1 R2.2 U1.8 | length 175.5
  Top Layer w0.381: J1.12 J1.10 J1.8 J1.6 J1.4 J1.2 ; v1(75,26) 75,24.483 74.758,24.242 74.758,23.242 R2.2 76,50 77.428,51.429 78.428,51.429 v1(78.5,51.5) ; R1.1 86,57.5 v1(93,57.5)
  Bottom Layer w0.381: J1.2 7,29.08 7,34.277 7.747,35.024 50.666,35.024 U1.8 60.38,33.88 60.5,34 71,34 73,32 73,26.285 73.269,26.015 73.317,26.015 73.738,25.595 74.427,25.595 74.832,26 v1(75,26) ; v1(78.5,51.5) 79.809,50.191 79.809,47.691 82,45.5 90,45.5 93.5,49 93.5,57 v1(93,57.5)
NetJ3_1: J3.1 R5.1 U1.2 | length 68.7
  Top Layer w0.381: R5.1 72,48.5 v1(72,60)
  Bottom Layer w0.381: U1.2 47.816,46.58 48.96,45.436 58.706,45.436 59.27,46 R5.1 ; v1(72,60) 76.407,60 83.649,67.242 83.649,69.109 J3.1
NetJ3_2: J3.2 J4.1 | length 20.2
  Bottom Layer w0.381: J4.1 93.5,64.73 93.5,79.277 93.277,79.5 J3.2
NetJ4_2: J4.2 U1.1 U1.5 | length 64.6
  Top Layer w0.381: U1.5 43.887,38.96 43.347,39.5 43.223,39.5 43.046,39.677 43.046,47.976 U1.1
  Bottom Layer w0.381: U1.1 49.935,49.12 51.815,51 67,51 73,57 77.95,57 85.72,64.77 J4.2
NetJ5_2: J5.2 J6.1 R3.1 U2.8 | length 74.9
  Top Layer w0.381: R3.1 76,64.5 v1(82.5,58) ; v1(82,47.5) 82.5,47.5 82.538,47.462 J5.2 90.538,47.462 v1(93.5,44.5)
  Bottom Layer w0.381: U2.8 65.62,66.38 R3.1 ; v1(82,47.5) 82,57.333 82.5,57.833 v1(82.5,58) ; J6.1 93.5,23.5 v1(93.5,44.5)
NetJ5_3: J5.3 R9.2 U2.7 | length 150.3
  Top Layer w0.381: R9.2 46.5,22.208 46,22.708 46,65.847 50.216,70.064 51.164,70.064 51.834,69.394 51.834,67.524 U2.7 50.69,56.81 v1(51.5,56)
  Bottom Layer w0.381: v1(51.5,56) 66.764,56 68.348,57.584 74.817,57.584 83.197,65.964 91.494,65.964 92.194,65.264 92.194,64.276 91.342,63.424 85.66,63.424 81.106,58.87 81.106,57.13 76.606,52.63 76.606,50.068 81.758,44.916 86.584,44.916 J5.3
NetJ5_4: J5.4 R5.2 | length 12.2
  Top Layer w0.381: R5.2 84.962,39.538 J5.4
NetJ6_2: J6.2 U2.9 | length 112.2
  Top Layer w0.381: v1(60.5,86.5) 68.5,86.5 v1(69,87) ; v1(84.5,73.5) 87,73.5 89,71.5 89,59.723 89.223,59.5 92.5,59.5 94.5,57.5 94.5,35.5 89.5,30.5 89.5,25.5 J6.2
  Bottom Layer w0.381: U2.9 60.5,71.11 v1(60.5,86.5) ; v1(69,87) 75.607,87 85.5,77.107 85.5,74.5 v1(84.5,73.5)
NetJ7_1: J7.1 J10.2 | length 38.7
  Top Layer w0.381: J10.2 60.5,10 90,10 J7.1
NetJ7_2: J7.2 U1.3 | length 75.4
  Bottom Layer w0.381: U1.3 48.126,40.104 61.49,40.104 65.593,36 86.5,36 88.5,34 88.5,19.5 92.044,15.956 92.044,10.044 J7.2
NetJ8_2: J8.2 J9.1 | length 13.7
  Bottom Layer w0.381: J9.1 74,4.5 76,2.5 80.777,2.5 81,2.723 J8.2
NetJ9_2: J9.2 R8.1 | length 34.8
  Top Layer w0.381: R8.1 49.658,9.158 49.658,1.842 50,1.5 67.777,1.5 68,1.723 J9.2
NetJ9_3: J9.3 J11.1 | length 24.6
  Bottom Layer w0.381: J11.1 45.04,2.5 64,2.5 J9.3
NetJ10_1: J10.1 R6.2 | length 36.2
  Top Layer w0.381: v1(51.53,6.705) 58.5,13.675 58.5,26.5 62.5,30.5 R6.2
  Bottom Layer w0.381: v1(51.53,6.705) 51.648,6.586 52.137,6.586 52.223,6.5 55,6.5 J10.1
NetJ10_3: J10.3 R7.2 | length 12.5
  Top Layer w0.381: J10.3 61.315,12.815 61.315,13.315 R7.2
NetJ12_2: J12.2 R10.2 R11.1 U2.1 | length 277.6
  Bottom Layer w0.381: J12.2 31,4.5 36.5,10 56.777,10 57,10.223 57,17.5 57.5,18 68.277,18 68.5,18.223 R10.2 66.5,20 58,20 55.5,17.5 26,17.5 19,10.5 5,10.5 2,13.5 2,91.277 2.223,91.5 7.5,91.5 12.5,96.5 43.777,96.5 44,96.277 44,88.31 U2.1 50.57,81.5 48.5,81.5 48,82 R11.1
NetJ13_2: J13.2 J13.4 J13.6 J13.8 J13.10 J13.12 R8.2 U2.2 U2.10 | length 148
  Top Layer w0.381: J13.12 J13.10 J13.8 J13.6 ; J13.2 J13.4 J13.6 ; R8.2 54,68 57.5,71.5 58.27,71.5 U2.10 ; v1(55.871,77.81) 51.96,77.81 U2.2 46.92,79.08 32,94 4.723,94 4.5,93.777 4.5,80.5 J13.6
  Bottom Layer w0.381: v1(55.871,77.81) 55.989,77.692 56.357,77.692 56.365,77.684 59.093,77.684 59.5,77.277 59.5,72.65 U2.10
"NetKey Q1_1": "Key Q1.1" R11.2 U2.3 | length 39.3
  Bottom Layer w0.381: 38,93.5 38,89 33.5,84.5 33.5,76 36.5,73 R11.2 40.5,73 44.04,76.54 U2.3
"NetKey W1_1": "Key W1.1" R10.1 | length 94.9
  Top Layer w0.381: R10.1 71.5,13 72,13.5 72,26 73.5,27.5 v1(73.5,62.5)
  Bottom Layer w0.381: 54.27,93.5 54.27,90.23 55,89.5 59.5,89.5 73.5,75.5 v1(73.5,62.5)
"NetKey W1_2": "Key W1.2" R9.1 U2.6 | length 88.6
  Top Layer w0.381: R9.1 49.777,13 50,13.223 50,40.121 49.546,40.575 49.546,67.776 U2.6
  Bottom Layer w0.381: U2.6 53.697,68.92 54,69.223 54,88.5 51.73,90.77 51.73,93.5
NetQ1_1: Q1.1 Q2.1 U1.7 | length 91.4
  Top Layer w0.381: v1(59.5,31.5) 59.5,52.243 64.494,57.237 64.494,69.777 64.717,70 73.777,70 76,72.223 76,80.95 Q2.1 77.05,83 Q1.1
  Bottom Layer w0.381: U1.7 46.57,31.5 v1(59.5,31.5)
Vout: J14.3 Q1.3 Q2.3 U1.6 | length 130.9
  Top Layer w0.381: J14.3 16.481,47.5 32.5,47.5 36,44 36,36.723 36.303,36.42 U1.6 42,38.61 v1(42,58) ; v1(67.5,77.5) 68.449,78.449 69.284,78.449 70.115,79.28 70.115,80.165 Q2.3 72.2,82.75 72.2,93.357 Q1.3
  Bottom Layer w0.381: v1(42,58) 54.834,58 58.834,62 71.277,62 71.5,62.223 71.5,74.5 68.572,77.428 67.572,77.428 v1(67.5,77.5)
pads on no net: U2.12 U2.13 U2.14

## Polygon pours and split planes (outlines as drawn)
NetJ1_2 on Top Layer "NETJ1_2_L01_P004" (solid, pour order 4): 2.5,95 93,95 92.5,94.5 92.5,4.5 2.5,4.5
GND on GND "GND_L02_P005" (solid, pour order 5): 2.5,95 92.5,95 92.5,4.5 2.5,4.5
+VCC on POWER "+VCC_L03_P007" (solid, pour order 7): 8,99 83,99 84.5,97.5 84.5,17 10.5,17
NetJ10_3 on Bottom Layer "NETJ10_3_L04_P008" (solid, pour order 8): 6,97.5 89,97.5 89,1.5 5.5,1.5

## Text inside footprints (layer, text, board x,y; h text height)
C6: Top Overlay "+" at 33.408,12.737 h1.5 r180
C7: Top Overlay "+" at 73.092,54.763 h1.5
C14: Top Overlay "+" at 31.408,54.737 h1.5 r180
C15: Top Overlay "+" at 38.737,44.092 h1.5 r90
C16: Top Overlay "+" at 35.763,67.408 h1.5 r270
J1: Top Overlay "11" at 10.03,13.42 h1.02 r90; Top Overlay "12" at 7.43,13.42 h1.02 r90; Top Overlay "2" at 7.43,30.37 h1.02 r90; Top Overlay "1" at 10.03,30.37 h1.02 r90
J13: Top Overlay "11" at 9.3,68.23 h1.02 r90; Top Overlay "12" at 6.7,68.23 h1.02 r90; Top Overlay "2" at 6.7,85.18 h1.02 r90; Top Overlay "1" at 9.3,85.18 h1.02 r90